# Altium PCB Voltmetr_MEZ.PcbDoc
Units mm, origin at the board's own origin, x right, y up, seen from the top; angles counter-clockwise.
Board outline 73 x 50 mm, 2 copper layers (Top Layer, Bottom Layer); 32 components, 62 nets, 193 pads, 3 vias.
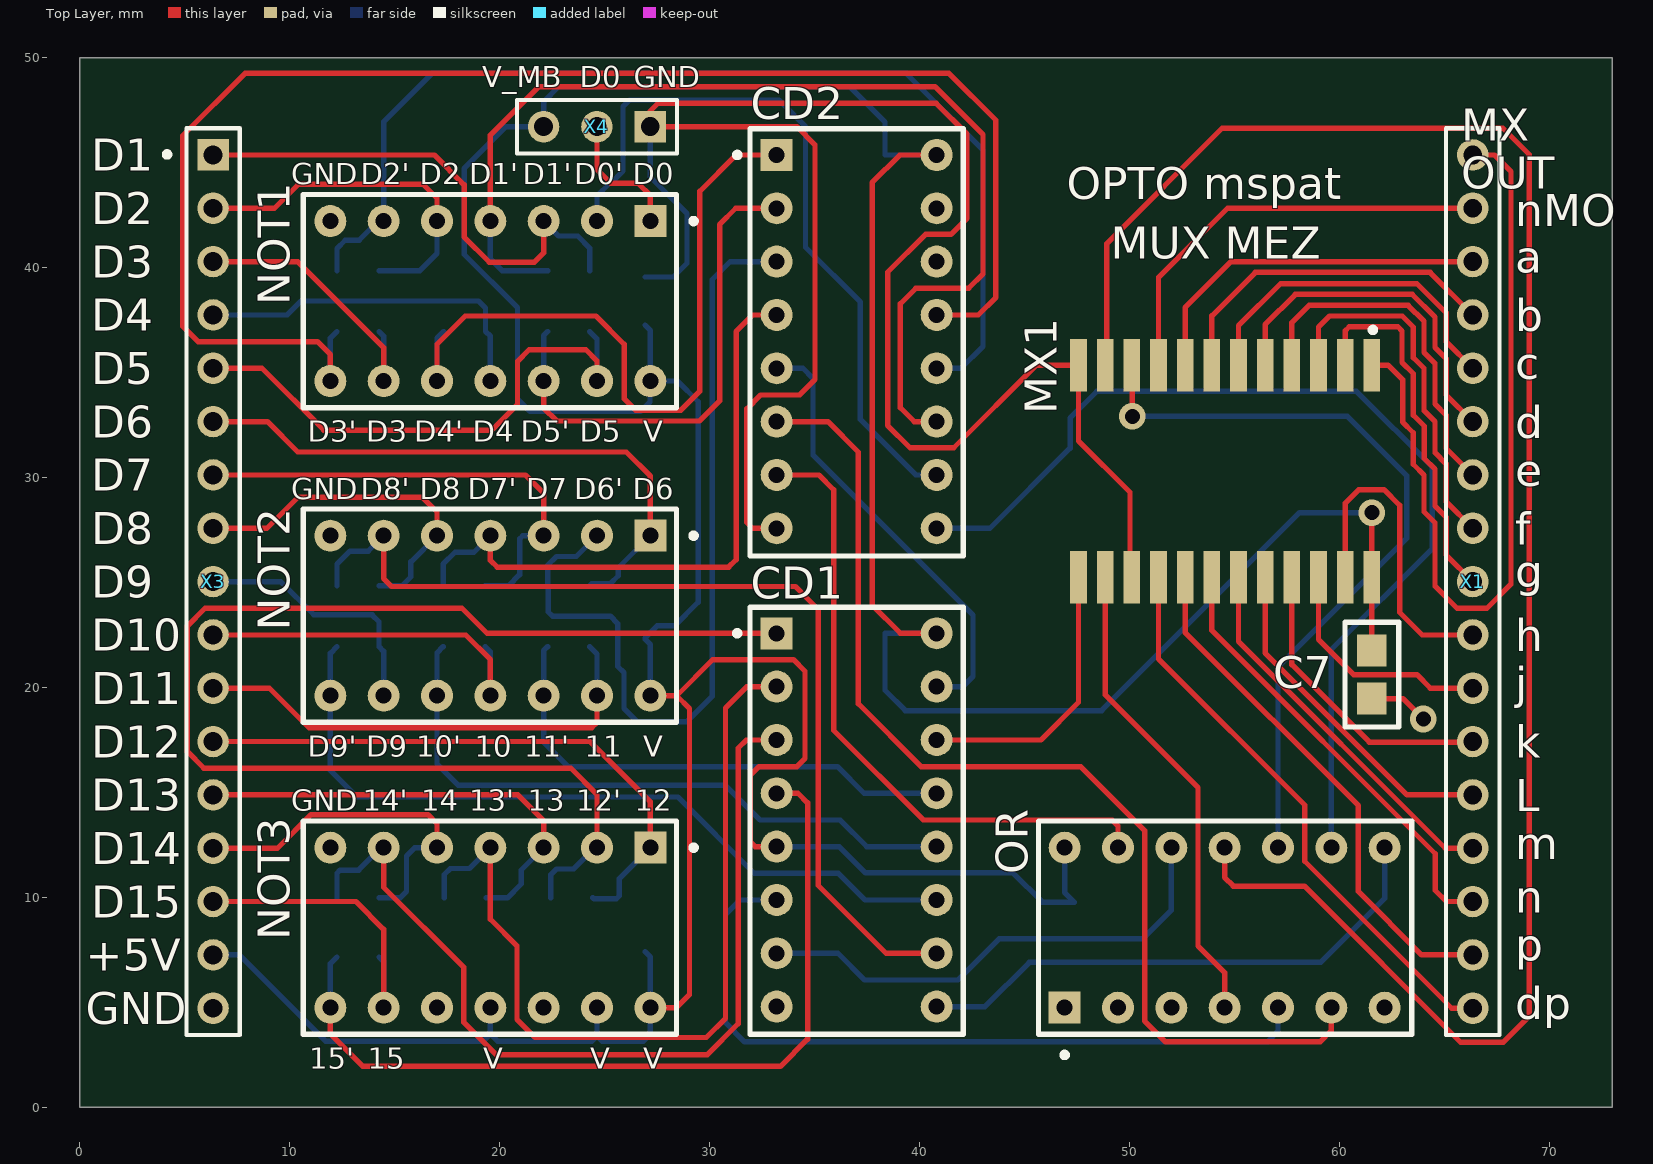
[diagram p0: Top Layer view]
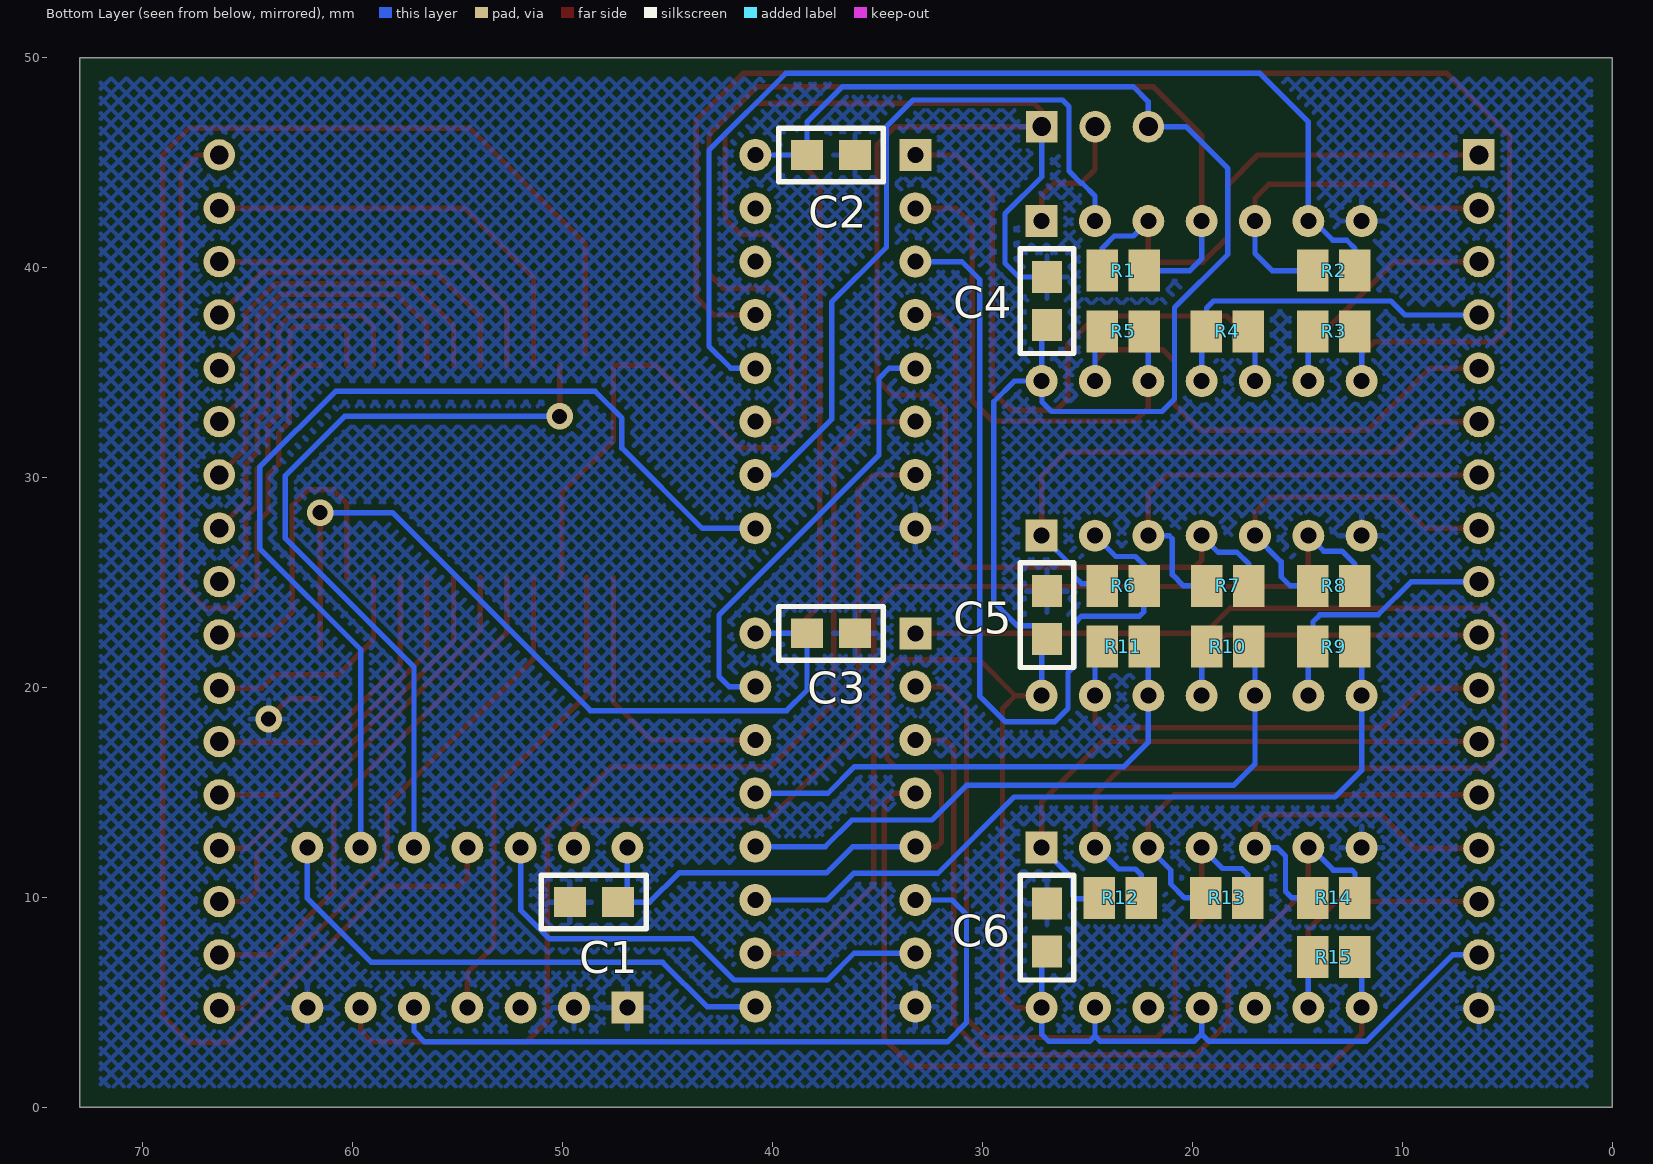
[diagram p1: Bottom Layer view, seen from below]

## Layer stack, top to bottom
Top Solder: solder mask 0.0102, Solder Resist, Dk 3.5
Top Layer: signal copper 0.0356
Dielectric 1: dielectric 0.32, FR-4, Dk 4.8
Bottom Layer: signal copper 0.0356
Bottom Solder: solder mask 0.0102, Solder Resist, Dk 3.5

## Board outline
0,50 73,50 73,0 0,0

## Design rules (kind name [scope] priority, off if disabled: settings)
Clearance [All] p1: gap=0.254 ignorepadtopadclearanceinfootprint=FALSE except(0: Arc-Hole Track-Hole SMDPad-Hole THPad-Hole Via-Hole Fill-Hole Poly-Hole Region-Hole Text-Hole)
PolygonConnect [All] p1: connectstyle=Relief reliefconductorwidth=0.254 reliefentries=4 polygonreliefangle="90 Angle" airgapwidth=0.254
RoutingVias [All] p1: holewidth=0.711 width=1.27 viastyle="Through Hole" minholewidth=0.711 minwidth=1.27 maxholewidth=0.711 maxwidth=1.27
SolderMaskExpansion [All] p1: expansion=0.102 istentingtop=FALSE
Width [All] p1: maxlimit=0.254 minlimit=0.254 preferedwidth=0.254
30 further rules are at their usual default settings.

## Components (designator, comment, footprint, x,y, rotation, side; value= is the part's Value field where it differs from the comment)
C1 "CAP_SMALL" CAP_SMALL 51.021,8.51 r180 bottom
C2 "CAP_SMALL" CAP_SMALL 39.718,44.096 r180 bottom
C3 "CAP_SMALL" CAP_SMALL 34.704,23.852 r0 bottom
C4 "CAP_SMALL" CAP_SMALL 28.194,40.913 r270 bottom
C5 "CAP_SMALL" CAP_SMALL 28.194,25.953 r270 bottom
C6 "CAP_SMALL" CAP_SMALL 28.194,11.068 r270 bottom
C7 "CAP_SMALL" CAP_SMALL 62.814,18.106 r90 top
CD1 "CD4532BE" DIP16_PANNEL 37.008,13.694 r0 top
CD2 "CD4532BE" DIP16_PANNEL 37.008,36.476 r0 top
MX1 "CD74HC4067M96" SOIC-24 61.544,35.357 r270 top
NOT1 "К561ЛН2" Dip14_pannel 19.561,38.406 r270 top (schematic designator DD2)
NOT2 "К561ЛН2" Dip14_pannel 19.561,23.42 r270 top (schematic designator DD3)
NOT3 "К561ЛН2" Dip14_pannel 19.561,8.561 r270 top (schematic designator DD4)
OR "CD4071BE" Dip14_pannel 54.534,8.563 r90 top (schematic designator DD1)
R1 "resistor" "RES 0805" 23.292,39.854 r180 bottom
R2 "resistor" "RES 0805" 13.259,39.854 r180 bottom
R3 "resistor" "RES 0805" 13.259,36.958 r180 bottom
R4 "resistor" "RES 0805" 18.339,36.958 r180 bottom
R5 "resistor" "RES 0805" 23.292,36.958 r180 bottom
R6 "resistor" "RES 0805" 23.292,24.843 r180 bottom
R7 "resistor" "RES 0805" 18.313,24.843 r180 bottom
R8 "resistor" "RES 0805" 13.259,24.843 r180 bottom
R9 "resistor" "RES 0805" 13.259,21.947 r180 bottom
R10 "resistor" "RES 0805" 18.313,21.947 r180 bottom
R11 "resistor" "RES 0805" 23.292,21.947 r180 bottom
R12 "resistor" "RES 0805" 23.444,9.984 r180 bottom
R13 "resistor" "RES 0805" 18.364,9.984 r180 bottom
R14 "resistor" "RES 0805" 13.259,9.984 r180 bottom
R15 "resistor" "RES 0805" 13.259,7.164 r180 bottom
X1 "Header 17" HDR1X17#1 66.353,4.726 r90 top
X3 "Header 17" HDR1X17#2 6.353,4.726 r90 top
X4 "Header 3" HDR1X3 27.178,46.712 r180 top

## Footprints (in the part's own frame and the unit in brackets; to place one, negate y for a bottom-side part, rotate by r counter-clockwise, add the part's x,y. Pads: shape width x height; smd on the part's side, far side on the other; paste and mask are expansions set on the pad)
CAP_SMALL [mil] "FROM_MAX"
  rect 60x55.98 smd: 1(53.71,50) 2(143.71,50)
  silkscreen extent 1,0 197,100, body extent 20,18 178,82, height 100
Dip14_pannel [mil]
  rect 60x60 hole 30: 1(-150,300)
  round 60 hole 30: 2(-150,200) 3(-150,100) 4(-150,0) 5(-150,-100) 6(-150,-200) 7(-150,-300) 8(150,-300) 9(150,-200) 10(150,-100) 11(150,0) 12(150,100) 13(150,200) 14(150,300)
  silkscreen extent -200,-351 200,349
DIP16_PANNEL [mil]
  rect 60x60 hole 30: 1(-150,350)
  round 60 hole 30: 2(-150,250) 3(-150,150) 4(-150,50) 5(-150,-50) 6(-150,-150) 7(-150,-250) 8(-150,-350) 9(150,-350) 10(150,-250) 11(150,-150) 12(150,-50) 13(150,50) 14(150,150) 15(150,250) 16(150,350)
  silkscreen extent -200,-402 200,399
HDR1X3 [mm] "Connector; Header; 3 Position"
  rect 1.5x1.5 hole 0.9: 1(0,0)
  round 1.5 hole 0.9: 2(2.54,0) 3(5.08,0)
  silkscreen extent -1.27,-1.27 6.35,1.27
HDR1X17#1 [mm] "Connector; Header; 17 Position"
  round 1.5 hole 0.9: 1(0,0) 2(2.54,0) 3(5.08,0) 4(7.62,0) 5(10.16,0) 6(12.7,0) 7(15.24,0) 8(17.78,0) 9(20.32,0) 10(22.86,0) 11(25.4,0) 12(27.94,0) 13(30.48,0) 14(33.02,0) 15(35.56,0) 16(38.1,0) 17(40.64,0)
  silkscreen extent -1.27,-1.27 41.91,1.27
HDR1X17#2 [mm] "Connector; Header; 17 Position"
  round 1.5 hole 0.9: 1(0,0) 2(2.54,0) 3(5.08,0) 4(7.62,0) 5(10.16,0) 6(12.7,0) 7(15.24,0) 8(17.78,0) 9(20.32,0) 10(22.86,0) 11(25.4,0) 12(27.94,0) 13(30.48,0) 14(33.02,0) 15(35.56,0) 16(38.1,0)
  rect 1.5x1.5 hole 0.9: 17(40.64,0)
  silkscreen extent -1.27,-1.27 41.91,1.27
"RES 0805" [mm]
  rect 1.5x2 smd: 1(-1,0) 2(1,0)
SOIC-24 [mm]
  rect 2.5x0.8 smd: 1(0,0) 2(0,-1.27) 3(0,-2.54) 4(0,-3.81) 5(0,-5.08) 6(0,-6.35) 7(0,-7.62) 8(0,-8.89) 9(0,-10.16) 10(0,-11.43) 11(0,-12.7) 12(0,-13.97) 13(10.1,-13.97) 14(10.1,-12.7) 15(10.1,-11.43) 16(10.1,-10.16) 17(10.1,-8.89) 18(10.1,-7.62) 19(10.1,-6.35) 20(10.1,-5.08) 21(10.1,-3.81) 22(10.1,-2.54) 23(10.1,-1.27) 24(10.1,0)
  silkscreen extent -1.7,0 -1.65,0.05

## Part data
CD1 CD2: "Шифратор приоритетный 8 - 3 [DIP-16]"
MX1: "16-и канальный аналоговый мультиплексор/ демультиплексор, [SO-24]"
NOT1 NOT2 NOT3: "Шесть логических элементов \"HЕ\" (DIP-14)"
OR: "Четыре логических элемента \"2ИЛИ\", [DIP-14]"
R1 R2 R3 R4 R5 R6 R7 R8 R9 R10 R11 R12 R13 R14 R15: library part RES
X1 X3: "Header, 17-Pin", LatestRevisionDate=17-Jul-2002, LatestRevisionNote="Re-released for DXP Platform.", Publisher="Altium Limited"
X4: "Header, 3-Pin", LatestRevisionDate=17-Jul-2002, LatestRevisionNote="Re-released for DXP Platform.", Publisher="Altium Limited"

## Via types
v1: diameter 1.27, hole 0.711, Top Layer to Bottom Layer, 3 vias

## Nets (pads, with @x,y where several pads share a name; then routed paths per layer and width w, separated by ;. In a path a pad name is that pad's centre, name@x,y a point inside that pad or via, vN(x,y) a via of type N, cw(c..) or ccw(c..) an arc to the next point about the centre after c; other vN are vias at no path point)
\M\O\: MX1.9 X1.16 | length 20.5
  Top Layer w0.254: MX1.9 51.384,39.534 54.676,42.826 X1.16
a: MX1.8 X1.15 | length 17.3
  Top Layer w0.254: MX1.8 52.654,38.104 54.836,40.286 X1.15
b: MX1.7 X1.14 | length 16.5
  Top Layer w0.254: MX1.7 53.924,37.705 55.994,39.775 64.324,39.775 X1.14
c: MX1.6 X1.13 | length 16.3
  Top Layer w0.254: MX1.6 55.194,37.234 57.193,39.233 63.7,39.233 65.083,37.85 65.083,36.476 X1.13
d: MX1.5 X1.12 | length 16.8
  Top Layer w0.254: MX1.5 56.464,37.289 57.9,38.725 63.471,38.725 64.55,37.646 64.55,36.2 65.083,35.667 65.083,33.936 X1.12
D0: NOT1.1 X4.2 | length 6.3
  Top Layer w0.254: X4.2 24.638,44.68 25.298,44.02 26.594,44.02 27.181,43.433 NOT1.1
D0': CD2.10 NOT1.2 | length 35
  Bottom Layer w0.254: NOT1.2 24.641,43.413 25.248,44.02 ; 25.298,44.02 25.883,44.604 25.883,47.671 26.194,47.982 33.299,47.982 34.569,46.712 34.569,40.972 37.186,38.355 37.186,32.767 39.827,30.126 CD2.10
D1: NOT1.3 R1.1 X3.17 | length 24.8
  Top Layer w0.254: X3.17 16.891,45.366 18.313,43.943 18.313,41.454 19.507,40.26 21.666,40.26 22.101,40.695 NOT1.3
  Bottom Layer w0.254: NOT1.3 22.812,41.505 23.724,41.505 24.292,40.937 R1.1
D1': CD2.11 NOT1.4 R1.2 | length 52.3
  Top Layer w0.254: NOT1.4 19.561,46.308 21.869,48.617 40.742,48.617 43.028,46.331 43.028,39.702 42.342,39.016 39.827,39.016 39.091,38.279 39.091,33.326 39.751,32.666 CD2.11
  Bottom Layer w0.254: NOT1.4 19.561,40.41 20.117,39.854 R1.2
D2: NOT1.5 R2.1 X3.16 | length 17.2
  Top Layer w0.254: X3.16 9.271,42.826 10.414,43.969 16.358,43.969 17.021,43.306 NOT1.5
  Bottom Layer w0.254: R2.1 16.205,39.854 17.021,40.67 NOT1.5
D2': CD2.12 NOT1.6 R2.2 | length 51.6
  Bottom Layer w0.254: R2.2 12.259,40.911 12.649,41.302 13.31,41.302 14.224,42.216 NOT1.6 14.481,46.943 16.789,49.252 39.37,49.252 43.028,45.594 43.028,36.247 41.986,35.206 CD2.12
D3: NOT1.9 R3.1 X3.15 | length 13.9
  Top Layer w0.254: X3.15 10.381,40.286 14.481,36.186 NOT1.9
  Bottom Layer w0.254: R3.1 14.481,36.736 NOT1.9
D3': CD2.13 NOT1.8 R3.2 | length 72.9
  Top Layer w0.254: NOT1.8 11.941,35.863 11.328,36.476 5.639,36.476 4.902,37.212 4.902,46.28 7.874,49.252 41.402,49.252 43.637,47.017 43.637,38.584 42.799,37.746 CD2.13
  Bottom Layer w0.254: NOT1.8 11.941,36.64 R3.2
D4: NOT1.11 R4.1 X3.14 | length 17
  Bottom Layer w0.254: X3.14 9.881,37.746 10.541,38.406 18.999,38.406 19.329,38.076 19.329,36.968 R4.1 19.561,36.736 NOT1.11
D4': CD2.1 NOT1.10 R4.2 | length 35
  Top Layer w0.254: NOT1.10 17.021,36.352 18.364,37.695 24.587,37.695 25.933,36.349 25.933,33.758 26.482,33.209 28.636,33.209 29.54,34.114 29.54,43.639 31.267,45.366 CD2.1
  Bottom Layer w0.254: NOT1.10 17.021,36.64 R4.2
D5: NOT1.13 R5.1 X3.13 | length 26
  Top Layer w0.254: X3.13 8.687,35.206 11.633,32.259 19.634,32.259 20.853,33.479 20.853,35.536 21.412,36.095 24.105,36.095 24.641,35.559 NOT1.13
  Bottom Layer w0.254: R5.1 24.641,36.609 NOT1.13
D5': CD2.2 NOT1.12 R5.2 | length 24.2
  Top Layer w0.254: NOT1.12 22.101,33.323 22.733,32.691 29.515,32.691 30.48,33.656 30.48,42.055 31.251,42.826 CD2.2
  Bottom Layer w0.254: NOT1.12 22.101,36.767 R5.2
D6: NOT2.1 R6.1 X3.12 | length 28.8
  Top Layer w0.254: X3.12 8.941,32.666 10.389,31.218 26.035,31.218 27.181,30.072 NOT2.1
  Bottom Layer w0.254: R6.1 24.394,24.945 25.274,24.945 25.654,25.325 25.654,25.703 NOT2.1
D6': CD2.3 NOT2.2 R6.2 | length 41.1
  Bottom Layer w0.254: NOT2.2 23.65,26.24 22.708,26.24 22.292,25.824 R6.2 22.311,24.824 22.311,23.61 22.521,23.4 25.276,23.4 25.625,23.051 25.625,21.013 25.925,20.713 25.925,19 26.55,18.375 28.925,18.375 30.124,19.574 30.124,39.422 30.988,40.286 CD2.3
D7: NOT2.3 R7.1 X3.11 | length 22.9
  Top Layer w0.254: X3.11 21.234,30.126 22.101,29.259 NOT2.3
  Bottom Layer w0.254: R7.1 20.422,24.843 20.955,25.376 20.955,27.081 21.104,27.23 NOT2.3
D7': CD2.4 NOT2.4 R7.2 | length 30.1
  Top Layer w0.254: NOT2.4 19.561,26.059 19.888,25.732 30.912,25.732 31.267,26.087 31.267,36.958 32.055,37.746 CD2.4
  Bottom Layer w0.254: R7.2 17.313,25.875 17.882,26.443 18.773,26.443 NOT2.4
D8: NOT2.5 R8.1 X3.10 | length 16.9
  Top Layer w0.254: X3.10 8.915,27.586 10.389,29.059 16.332,29.059 17.021,28.37 NOT2.5
  Bottom Layer w0.254: R8.1 15.342,24.843 15.773,25.274 15.773,25.983 NOT2.5
D8': CD1.10 NOT2.6 R8.2 | length 47.3
  Top Layer w0.254: NOT2.6 14.481,25.195 14.862,24.814 34.09,24.814 35.179,23.725 35.179,10.568 38.403,7.344 CD1.10
  Bottom Layer w0.254: R8.2 12.259,25.875 12.878,26.494 13.744,26.494 NOT2.6
D9: NOT2.9 R9.1 X3.9 | length 12.3
  Bottom Layer w0.254: X3.9 9.576,25.046 11.151,23.471 11.342,23.471 11.351,23.462 13.929,23.462 14.259,23.131 R9.1 14.481,21.725 NOT2.9
D9': CD1.11 NOT2.8 R9.2 | length 37.5
  Bottom Layer w0.254: R9.2 11.941,21.629 11.941,16.051 13.208,14.784 28.499,14.784 32.131,11.152 36.144,11.152 37.413,9.884 CD1.11
D10: NOT2.11 R10.1 X3.8 | length 17.9
  Top Layer w0.254: X3.8 18.39,22.506 19.561,21.335 NOT2.11
  Bottom Layer w0.254: R10.1 19.561,21.7 NOT2.11
D10': CD1.12 NOT2.10 R10.2 | length 31.1
  Bottom Layer w0.254: R10.2 17.021,21.654 NOT2.10 17.021,16.356 18.034,15.343 30.759,15.343 32.41,13.692 36.22,13.692 37.489,12.424 CD1.12
D11: NOT2.13 R11.1 X3.7 | length 22.9
  Top Layer w0.254: X3.7 9.042,19.966 10.922,18.086 24.384,18.086 24.641,18.343 NOT2.13
  Bottom Layer w0.254: R11.1 24.641,21.598 NOT2.13
D11': CD1.13 NOT2.12 R11.2 | length 24.4
  Bottom Layer w0.254: R11.2 22.101,21.756 NOT2.12 22.101,17.398 23.266,16.232 36.093,16.232 37.362,14.964 CD1.13
D12: NOT3.1 R12.1 X3.6 | length 28.4
  Top Layer w0.254: X3.6 24.308,17.426 27.181,14.553 NOT3.1
  Bottom Layer w0.254: R12.1 24.495,9.933 25.556,9.933 25.705,10.082 25.705,10.895 NOT3.1
D12': CD1.1 NOT3.2 R12.2 | length 61.6
  Top Layer w0.254: NOT3.2 24.641,14.908 23.393,16.156 5.918,16.156 5.131,16.943 5.131,22.938 5.969,23.776 18.212,23.776 19.404,22.584 CD1.1
  Bottom Layer w0.254: R12.2 22.444,11.092 22.708,11.355 23.527,11.355 24.543,12.371 NOT3.2
D13: NOT3.3 R13.1 X3.5 | length 21.7
  Top Layer w0.254: X3.5 20.879,14.886 22.101,13.664 NOT3.3
  Bottom Layer w0.254: R13.1 20.371,9.984 21.031,10.644 21.031,11.302 NOT3.3
D13': CD1.2 NOT3.4 R13.2 | length 40.8
  Top Layer w0.254: NOT3.4 19.561,8.965 20.828,7.698 20.828,4.192 21.692,3.329 29.845,3.329 30.759,4.243 30.759,19.026 31.777,20.044 CD1.2
  Bottom Layer w0.254: R13.2 17.364,11.092 17.653,11.381 18.57,11.381 NOT3.4
D14: NOT3.5 R14.1 X3.4 | length 17.4
  Top Layer w0.254: X3.4 9.423,12.346 11.024,13.946 16.586,13.946 17.021,13.511 NOT3.5
  Bottom Layer w0.254: R14.1 15.265,9.984 15.57,10.288 15.57,11.977 15.964,12.371 NOT3.5
D14': CD1.3 NOT3.6 R14.2 | length 43.2
  Top Layer w0.254: NOT3.6 14.481,10.489 18.288,6.682 18.288,4.065 19.837,2.516 29.896,2.516 31.369,3.989 31.369,17.121 31.752,17.504 CD1.3
  Bottom Layer w0.254: R14.2 12.259,11.156 12.408,11.304 13.291,11.304 14.358,12.371 NOT3.6
D15: NOT3.9 R15.1 X3.3 | length 14.9
  Top Layer w0.254: X3.3 13.157,9.806 14.481,8.482 NOT3.9
  Bottom Layer w0.254: R15.1 14.481,6.942 NOT3.9
D15': CD1.4 NOT3.8 R15.2 | length 40.6
  Top Layer w0.254: NOT3.8 11.941,3.504 13.487,1.957 33.376,1.957 34.671,3.253 34.671,14.505 34.212,14.964 CD1.4
  Bottom Layer w0.254: NOT3.8 11.941,6.846 R15.2
dp: MX1.16 X1.1 | length 27.3
  Top Layer w0.254: MX1.16 51.384,21.366 58.35,14.4 58.35,11.725 65.349,4.726 X1.1
e: MX1.4 X1.11 | length 17.3
  Top Layer w0.254: MX1.4 57.734,37.384 58.55,38.2 63.277,38.2 64.026,37.451 64.026,35.966 64.55,35.442 64.55,33.503 65.083,32.97 65.083,31.396 X1.11
E_cascade: CD1.15 CD2.5 | length 21.2
  Bottom Layer w0.254: CD2.5 34.442,35.206 34.925,34.723 34.925,31.066 42.545,23.446 42.545,20.525 42.064,20.044 CD1.15
f: MX1.3 X1.10 | length 17.5
  Top Layer w0.254: MX1.3 59.004,37.171 59.525,37.692 62.994,37.692 63.518,37.168 63.518,35.714 64.026,35.206 64.026,33.19 64.55,32.666 64.55,31.189 65.083,30.656 65.083,28.856 X1.10
g: MX1.2 X1.9 | length 17.8
  Top Layer w0.254: MX1.2 60.274,36.988 60.47,37.184 62.784,37.184 62.983,36.985 62.983,35.485 63.518,34.95 63.518,32.974 64.042,32.45 64.042,30.908 64.55,30.4 64.55,28.649 65.083,28.116 65.083,26.316 X1.9
GND: C1.1 C2.2 C3.1 C4.1 C5.1 C6.1 C7.1 CD1.8 CD2.8 MX1.12 MX1.15 NOT1.7 NOT2.7 NOT3.7 OR.1 OR.2 OR.7 X3.1 X4.1 | length 97.6
  Top Layer w0.254: CD2.8 32.055,27.586 31.775,27.865 31.775,33.275 32.436,33.936 34.29,33.936 35.027,34.672 35.027,45.848 34.163,46.712 X4.1 27.178,47.462 27.546,47.83 40.792,47.83 42.266,46.356 42.266,42.343 41.504,41.581 40.284,41.581 38.481,39.778 38.481,32.488 39.548,31.421 41.631,31.421 45.567,35.357 MX1.12 47.574,31.751 50.025,29.3 50.025,25.347 MX1.15 ; C7.1 63.03,19.47 v1(64,18.5)
  Bottom Layer w0.254: C4.1 28.27,39.549 28.931,40.21 28.931,42.569 27.178,44.322 X4.1
h: MX1.23 X1.8 | length 15.7
  Top Layer w0.254: MX1.23 60.274,28.774 60.925,29.425 62.125,29.425 62.875,28.675 62.875,23.575 63.944,22.506 X1.8
j: MX1.22 X1.7 | length 11.3
  Top Layer w0.254: MX1.22 59.004,22.284 60.675,20.613 63.687,20.613 64.334,19.966 X1.7
k: MX1.21 X1.6 | length 14.3
  Top Layer w0.254: MX1.21 57.734,21.091 61.425,17.4 66.327,17.4 X1.6
l: MX1.20 X1.5 | length 16.3
  Top Layer w0.254: MX1.20 56.464,21.642 63.221,14.886 X1.5
m: MX1.19 X1.4 | length 18.3
  Top Layer w0.254: MX1.19 55.194,22.194 65.042,12.346 X1.4
MX_OUT: MX1.1 X1.17 | length 38.6
  Top Layer w0.254: MX1.1 62.318,35.357 63.01,34.665 63.01,32.643 63.518,32.135 63.518,30.634 64.026,30.126 64.026,28.374 64.55,27.85 64.55,24.829 65.603,23.776 67.026,23.776 68.175,24.925 68.175,44.575 67.384,45.366 X1.17
n: MX1.18 X1.3 | length 21.3
  Top Layer w0.254: MX1.18 53.924,22.725 64.567,12.083 64.567,10.339 65.1,9.806 X1.3
p: MX1.17 X1.2 | length 25.1
  Top Layer w0.254: MX1.17 52.654,22.621 60.9,14.375 60.9,10.281 63.915,7.266 X1.2
Q0': MX1.10 OR.10 | length 36.9
  Top Layer w0.254: MX1.10 50.14,35.332 v1(50.14,32.918)
  Bottom Layer w0.254: v1(50.14,32.918) 60.382,32.918 63.2,30.1 63.2,27.1 57.074,20.974 OR.10
Q0_1: CD1.9 OR.8 | length 25.9
  Bottom Layer w0.254: CD1.9 43.124,4.804 45.231,6.91 59.106,6.91 62.154,9.958 OR.8
Q0_2: CD2.9 OR.9 | length 48.8
  Bottom Layer w0.254: CD2.9 43.361,27.586 47.174,31.399 47.174,32.837 48.444,34.107 60.818,34.107 64.425,30.5 64.425,26.625 59.614,21.814 OR.9
Q1': MX1.11 OR.11 | length 88.9
  Top Layer w0.254: MX1.11@48.927,35.902 48.927,41.152 54.411,46.636 67.789,46.636 69.05,45.375 69.05,4.35 67.8,3.1 65.778,3.1 58.336,10.542 54.951,10.542 54.534,10.96 OR.11
Q1_1: CD1.7 OR.12 | length 23.7
  Bottom Layer w0.254: CD1.7 36.117,7.344 37.389,6.072 41.834,6.072 43.79,8.028 50.622,8.028 51.994,9.399 OR.12
Q1_2: CD2.7 OR.13 | length 30.9
  Top Layer w0.254: CD2.7 35.204,30.126 35.916,29.415 35.916,17.959 40.183,13.692 49.174,13.692 49.454,13.413 OR.13
Q2': MX1.14 OR.4 | length 22.9
  Top Layer w0.254: MX1.14 48.844,19.661 53.264,15.241 53.264,7.698 54.534,6.428 OR.4
Q2_1: CD1.6 OR.5 | length 35.9
  Bottom Layer w0.254: CD1.6 31.447,9.884 30.759,9.196 30.759,4.04 31.674,3.126 56.566,3.126 57.074,3.634 OR.5
Q2_2: CD2.6 OR.6 | length 52.3
  Top Layer w0.254: CD2.6 35.636,32.666 37.083,31.219 37.083,19.23 40.081,16.232 47.676,16.232 50.724,13.184 50.724,4.116 51.714,3.126 59.08,3.126 59.614,3.659 OR.6
Q3': CD1.14 MX1.13 | length 13.5
  Top Layer w0.254: CD1.14 45.779,17.504 47.574,19.299 MX1.13
V_MB: C1.2 C2.1 C3.2 C4.2 C5.2 C6.2 C7.2 CD1.5 CD1.16 CD2.16 MX1.24 NOT1.14 NOT2.14 NOT3.11 NOT3.13 NOT3.14 OR.14 X3.2 X4.3 | length 219
  Top Layer w0.254: NOT3.14 28.426,4.751 29.05,5.375 29.05,19 28.44,19.61 ; NOT2.14 28.44,19.61 ; CD1.5 32.176,12.424 31.95,12.65 31.95,15.825 32.357,16.232 34.166,16.232 34.55,16.616 34.55,20.775 34,21.325 30.155,21.325 28.44,19.61 ; CD1.16 39.091,22.584 37.744,23.931 37.744,44.044 39.066,45.366 CD2.16 ; C7.2 MX1.24 v1(61.544,28.331)
  Bottom Layer w0.254: X3.2 7.609,7.266 11.725,3.15 19.204,3.15 19.561,3.507 ; NOT3.11 19.561,3.507 ; NOT3.13 24.641,3.405 ; C6.2 27.181,7.161 NOT3.14 27.181,3.488 26.843,3.15 24.896,3.15 24.641,3.405 ; C4.2 27.181,37.006 NOT1.14 ; NOT2.14 27.181,22.046 C5.2 26.924,22.354 27.508,22.938 28.338,22.938 29.464,24.064 29.464,33.611 28.479,34.596 NOT1.14 ; CD1.5 36.176,12.424 37.425,11.175 44.458,11.175 45.852,9.78 C1.2 46.914,10.238 OR.14 ; CD1.16 38.356,22.584 C3.2 38.354,19.871 39.325,18.9 48.675,18.9 58.106,28.331 v1(61.544,28.331) ; CD2.16 C2.1 38.354,46.928 36.665,48.617 22.819,48.617 22.098,47.896 X4.3 20.312,46.712 18.313,44.713 18.313,40.637 20.853,38.097 20.853,33.747 21.45,33.15 26.713,33.15 27.165,33.602 27.165,34.581 NOT1.14 ; 19.561,3.507 19.917,3.15 24.386,3.15 24.641,3.405
pads on no net: CD2.14 CD2.15 NOT3.10 NOT3.12 OR.3

## Polygon pours and split planes (outlines as drawn)
GND on Bottom Layer "NONET_L-01_P-001" (hatched 45Degree grid 0.508 track 0.203, remove dead copper, pour order 0): 1,49 72,49 72,1 1,1

## Silkscreen, mask and mechanical layers (free items; w line width, h text height)
Top Overlay:
  circle w0.3: c4.166,45.39 r0.1
  circle w0.3: c46.914,2.5 r0.1
  circle w0.3: c29.241,12.371 r0.1
  circle w0.3: c29.241,42.216 r0.1
  circle w0.3: c29.241,27.23 r0.1
  circle w0.3: c31.321,22.584 r0.1
  circle w0.3: c31.321,45.366 r0.1
  circle w0.3: c61.594,37.032 r0.1
  text "V_MB" at 19.175,48.602 h1
  text "D0" at 23.823,48.588 h1
  text "GND" at 26.388,48.588 h1
  text "D1" at 0.556,44.604 h1.52
  text "GND" at 10.081,43.965 h1
  text "D2'" at 13.398,43.965 h1
  text "D2" at 16.188,43.965 h1
  text "D1'" at 18.561,43.965 h1
  text "D1'" at 21.101,43.965 h1
  text "D0'" at 23.558,43.965 h1
  text "D0" at 26.348,43.965 h1
  text "MX / OUT" at 65.804,43.765 h1.52
  text "OPTO mspat" at 47.015,43.257 h1.52
  text "D2" at 0.556,42.064 h1.52
  text "nMO" at 68.379,41.979 h1.52
  text "MUX MEZ" at 49.098,40.413 h1.52
  text "a" at 68.375,39.758 h1.52
  text "D3" at 0.556,39.524 h1.52
  text "D4" at 0.556,36.984 h1.52
  text "b" at 68.375,36.964 h1.52
  text "c" at 68.375,34.678 h1.52
  text "D5" at 0.556,34.444 h1.52
  text "D6" at 0.556,31.904 h1.52
  text "d" at 68.375,31.884 h1.52
  text "D3'" at 10.858,31.697 h1
  text "D3" at 13.648,31.697 h1
  text "D4'" at 15.938,31.697 h1
  text "D4" at 18.728,31.697 h1
  text "D5'" at 21.018,31.697 h1
  text "D5" at 23.808,31.697 h1
  text "V" at 26.848,31.697 h1
  text "e" at 68.375,29.598 h1.52
  text "D7" at 0.556,29.364 h1.52
  text "GND" at 10.081,28.979 h1
  text "D8'" at 13.398,28.979 h1
  text "D8" at 16.188,28.979 h1
  text "D7'" at 18.478,28.979 h1
  text "D7" at 21.268,28.979 h1
  text "D6'" at 23.558,28.979 h1
  text "D6" at 26.348,28.979 h1
  text "D8" at 0.556,26.824 h1.52
  text "f" at 68.375,26.804 h1.52
  text "g" at 68.375,24.772 h1.52
  text "D9" at 0.556,24.284 h1.52
  text "D10" at 0.556,21.744 h1.52
  text "h" at 68.375,21.724 h1.52
  text "j" at 68.375,19.438 h1.52
  text "D11" at 0.556,19.204 h1.52
  text "D9'" at 10.858,16.711 h1
  text "D9" at 13.648,16.711 h1
  text "10'" at 16.021,16.711 h1
  text "10" at 18.811,16.711 h1
  text "11'" at 21.184,16.711 h1
  text "11" at 24.058,16.711 h1
  text "V" at 26.848,16.711 h1
  text "D12" at 0.556,16.664 h1.52
  text "k" at 68.375,16.644 h1.52
  text "D13" at 0.556,14.124 h1.52
  text "GND" at 10.081,14.12 h1
  text "14'" at 13.481,14.12 h1
  text "14" at 16.271,14.12 h1
  text "13'" at 18.561,14.12 h1
  text "13" at 21.351,14.12 h1
  text "12'" at 23.641,14.12 h1
  text "12" at 26.431,14.12 h1
  text "L" at 68.375,14.104 h1.52
  text "m" at 68.375,11.818 h1.52
  text "D14" at 0.556,11.584 h1.52
  text "n" at 68.375,9.278 h1.52
  text "D15" at 0.556,9.044 h1.52
  text "p" at 68.375,6.992 h1.52
  text "+5V" at 0.3,6.504 h1.52
  text "dp" at 68.375,4.198 h1.52
  text "GND" at 0.3,3.964 h1.52
  text "15'" at 10.941,1.852 h1
  text "15" at 13.731,1.852 h1
  text "V" at 19.228,1.852 h1
  text "V" at 24.308,1.852 h1
  text "V" at 26.848,1.852 h1
Mechanical 1:
  the board outline again, w0.254